# EAGLE board Sensor_7_V4 (EAGLE 7.6.0)
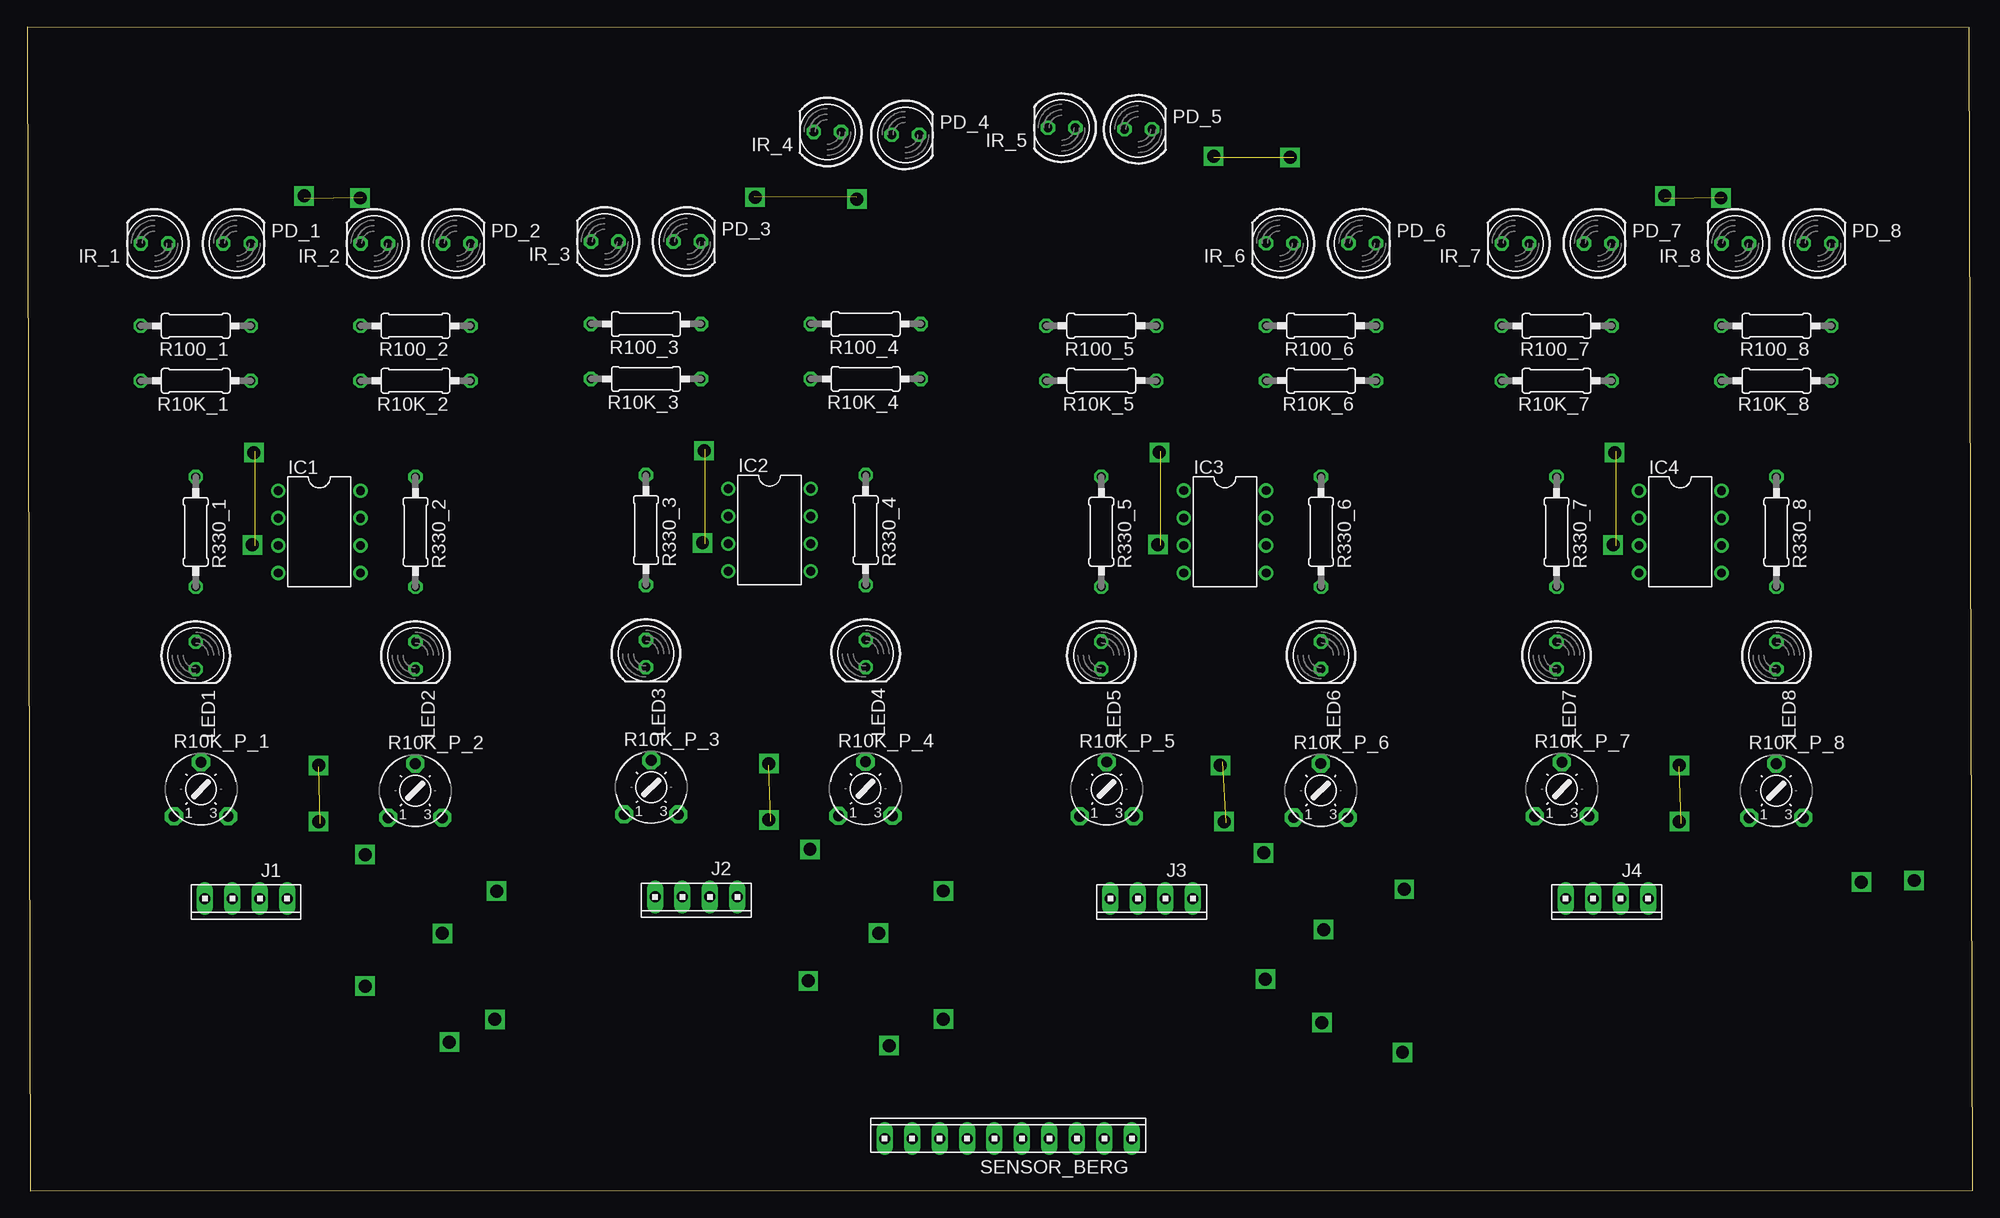
[diagram p0: board, top side]
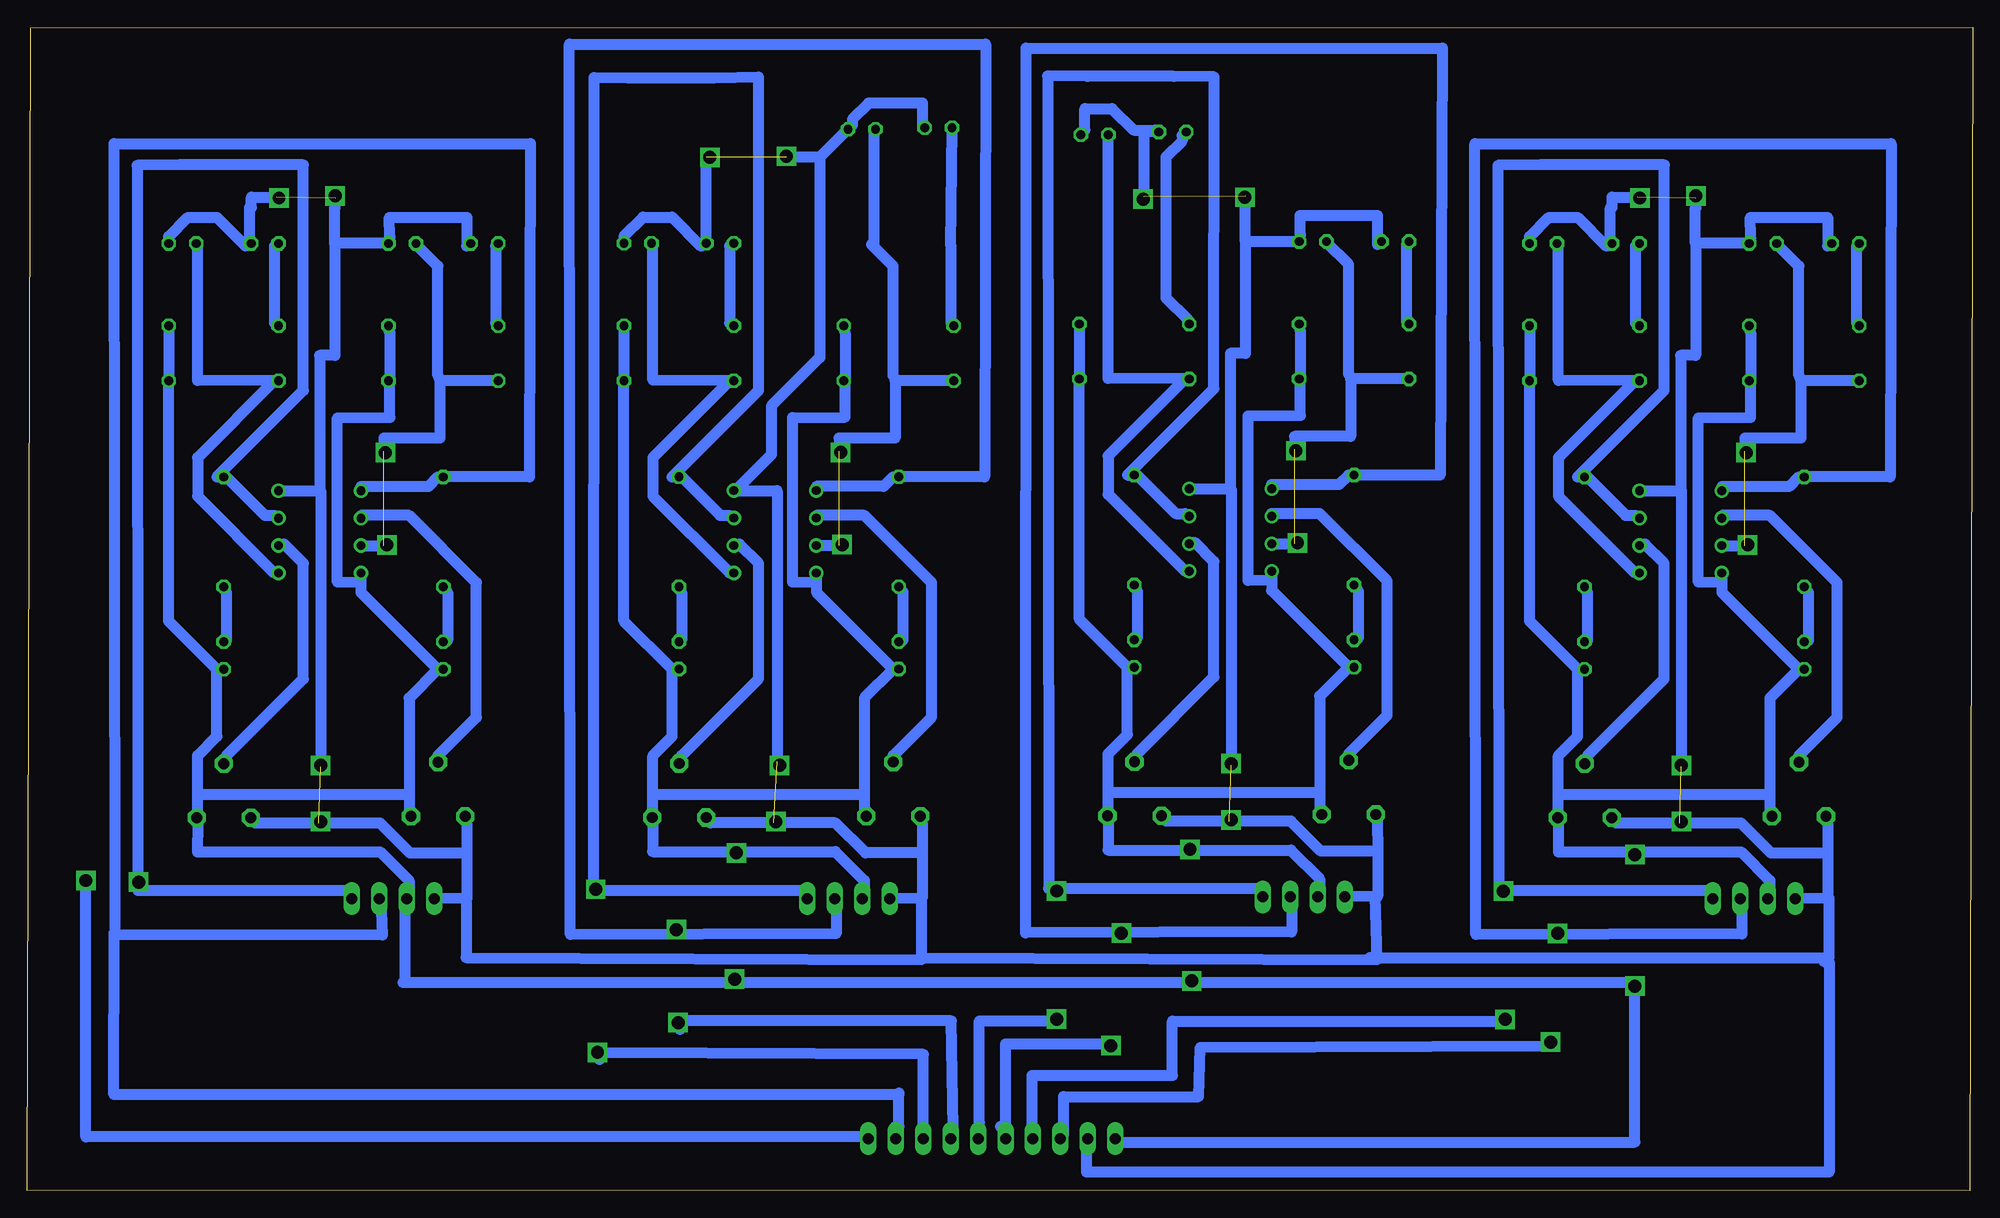
[diagram p1: board, bottom side, seen from below]

Size 179.94 x 107.61 mm. Coordinates in mm from the lower left corner, seen from the top.
Outline: 0.32,0 179.94,0.06 179.61,107.54 0,107.61 0.32,0
Copper layers (1*16): Top 0.035mm / dielectric 1.5mm / Bottom 0.035mm
Design rules "default *": minimum track width 40mil, minimum drill 24mil, track to track 30mil, track to pad 30mil, pad to pad 30mil, via to via 30mil, smd to smd 20mil, copper to edge 40mil, drill to drill 8mil, minimum pad ring 10mil, minimum via ring 8mil, stop-mask expansion 4mil, vias tented up to drill 0mil, thermal gap 10mil

## Footprints (pad centres in the part's own frame; a part is rotated, then mirrored left to right if it is on the bottom)
DIL08 = drill 0.813 pad 1.27: 1 -3.81,-3.81; 2 -1.27,-3.81; 3 1.27,-3.81; 4 3.81,-3.81; 5 3.81,3.81; 6 1.27,3.81; 7 -1.27,3.81; 8 -3.81,3.81
LED5MM = drill 0.813 octagon: A -1.27,0; K 1.27,0
10X04MTA = drill 1.016 long: 1 3.81,0; 2 1.27,0; 3 -1.27,0; 4 -3.81,0
0207/10 = drill 0.813 octagon: 1 -5.08,0; 2 5.08,0
6MM = drill 1 pad 1.676 octagon: A -2.5,-2.5; E 2.5,-2.5; S 0,2.5
10X10MTA = drill 1.016 long: 1 11.43,0; 2 8.89,0; 3 6.35,0; 4 3.81,0; 5 1.27,0; 6 -1.27,0; 7 -3.81,0; 8 -6.35,0; 9 -8.89,0; 10 -11.43,0

## Placement (x,y rotation side)
IC1  LM358N  [DIL08]  27.03,60.93 270 top
IC2  LM358N  [DIL08]  68.66,61.1 270 top
IC3  LM358N  [DIL08]  110.77,60.94 270 top
IC4  LM358N  [DIL08]  152.87,60.93 270 top
IR_1  [LED5MM]  11.79,87.6 180 top
IR_2  [LED5MM]  32.11,87.6 180 top
IR_3  [LED5MM]  53.42,87.77 180 top
IR_4  [LED5MM]  74.01,97.91 180 top
IR_5  [LED5MM]  95.67,98.3 180 top
IR_6  [LED5MM]  115.85,87.61 180 top
IR_7  [LED5MM]  137.63,87.6 180 top
IR_8  [LED5MM]  157.95,87.6 180 top
J1  [10X04MTA]  20.25,27.01 180 top
J2  [10X04MTA]  61.88,27.18 180 top
J3  [10X04MTA]  103.99,27.02 180 top
J4  [10X04MTA]  146.09,27.01 180 top
LED1  [LED5MM]  15.6,49.5 270 top
LED2  [LED5MM]  35.92,49.5 270 top
LED3  [LED5MM]  57.23,49.67 270 top
LED4  [LED5MM]  77.55,49.67 270 top
LED5  [LED5MM]  99.34,49.51 270 top
LED6  [LED5MM]  119.66,49.51 270 top
LED7  [LED5MM]  141.44,49.5 270 top
LED8  [LED5MM]  161.76,49.5 270 top
PD_1  [LED5MM]  19.41,87.6 0 top
PD_2  [LED5MM]  39.73,87.6 0 top
PD_3  [LED5MM]  61.04,87.77 0 top
PD_4  [LED5MM]  81.22,97.64 0 top
PD_5  [LED5MM]  102.75,98.16 0 top
PD_6  [LED5MM]  123.47,87.61 0 top
PD_7  [LED5MM]  145.25,87.6 0 top
PD_8  [LED5MM]  165.57,87.6 0 top
R10K_1  [0207/10]  15.6,74.9 180 top
R10K_2  [0207/10]  35.92,74.9 180 top
R10K_3  [0207/10]  57.23,75.07 180 top
R10K_4  [0207/10]  77.55,75.07 180 top
R10K_5  [0207/10]  99.34,74.91 180 top
R10K_6  [0207/10]  119.66,74.91 180 top
R10K_7  [0207/10]  141.44,74.9 180 top
R10K_8  [0207/10]  161.76,74.9 180 top
R10K_P_1  [6MM]  16.09,37.13 0 top
R10K_P_2  [6MM]  35.9,37 0 top
R10K_P_3  [6MM]  57.72,37.3 0 top
R10K_P_4  [6MM]  77.53,37.17 0 top
R10K_P_5  [6MM]  99.83,37.14 0 top
R10K_P_6  [6MM]  119.64,37.01 0 top
R10K_P_7  [6MM]  141.93,37.13 0 top
R10K_P_8  [6MM]  161.74,37 0 top
R100_1  [0207/10]  15.6,79.98 180 top
R100_2  [0207/10]  35.92,79.98 180 top
R100_3  [0207/10]  57.23,80.15 180 top
R100_4  [0207/10]  77.55,80.15 180 top
R100_5  [0207/10]  99.34,79.99 180 top
R100_6  [0207/10]  119.66,79.99 180 top
R100_7  [0207/10]  141.44,79.98 180 top
R100_8  [0207/10]  161.76,79.98 180 top
R330_1  [0207/10]  15.6,60.93 270 top
R330_2  [0207/10]  35.92,60.93 270 top
R330_3  [0207/10]  57.23,61.1 270 top
R330_4  [0207/10]  77.55,61.1 270 top
R330_5  [0207/10]  99.34,60.94 270 top
R330_6  [0207/10]  119.66,60.94 270 top
R330_7  [0207/10]  141.44,60.93 270 top
R330_8  [0207/10]  161.76,60.93 270 top
SENSOR_BERG  [10X10MTA]  90.73,4.82 0 top

## Library data of the parts
IC1-IC4 = linear
IR_1-IR_8 LED1-LED8 PD_1-PD_8 = led
J1-J4 SENSOR_BERG = con-amp
R10K_1-R10K_8 R100_1-R100_8 R330_1-R330_8 = eagle-ltspice; SPICEMODEL: NONE; SPICEPREFIX: R
R10K_P_1-R10K_P_8 = adafruit

## Nets
GND1: IC1.4 J1.2 LED1.K LED2.K R10K_1.1 R10K_2.1 R10K_P_1.E R10K_P_2.E R100_1.1 R100_2.1
GND2: IC2.4 J2.2 LED3.K LED4.K R10K_3.1 R10K_4.1 R10K_P_3.E R10K_P_4.E R100_3.1 R100_4.1
GND3: IC3.4 J3.2 LED5.K LED6.K R10K_5.1 R10K_6.1 R10K_P_5.E R10K_P_6.E R100_5.1 R100_6.1
GND4: IC4.4 J4.2 LED7.K LED8.K R10K_7.1 R10K_8.1 R10K_P_7.E R10K_P_8.E R100_7.1 R100_8.1
IC4_1: IC1.3 PD_1.A R10K_1.2
IC4_2: IC1.5 PD_2.A R10K_2.2
IC4_3: IC4.3 PD_7.A R10K_7.2
IC4_4: IC2.3 PD_3.A R10K_3.2
IC4_5: IC4.5 PD_8.A R10K_8.2
IC4_6: IC2.5 PD_4.A R10K_4.2
IC4_7: IC3.3 PD_5.A R10K_5.2
IC4_8: IC3.5 PD_6.A R10K_6.2
N$1: LED1.A R330_1.2
N$2: LED2.A R330_2.2
N$3: IC1.6 R10K_P_2.S
N$4: IR_1.K R100_1.2
N$5: IR_2.K R100_2.2
N$6: IC1.2 R10K_P_1.S
N$12: LED3.A R330_3.2
N$13: LED4.A R330_4.2
N$14: IC2.6 R10K_P_4.S
N$15: IR_3.K R100_3.2
N$16: IR_4.K R100_4.2
N$17: IC2.2 R10K_P_3.S
N$18: LED7.A R330_7.2
N$19: LED8.A R330_8.2
N$20: IC4.6 R10K_P_8.S
N$21: IR_7.K R100_7.2
N$22: IR_8.K R100_8.2
N$24: IC4.2 R10K_P_7.S
N$34: LED5.A R330_5.2
N$35: LED6.A R330_6.2
N$36: IC3.6 R10K_P_6.S
N$37: IR_5.K R100_5.2
N$38: IR_6.K R100_6.2
N$39: IC3.2 R10K_P_5.S
SENSOR_1: IC1.1 J1.3 R330_1.1
SENSOR_2: IC1.7 J1.4 R330_2.1
SENSOR_3: IC2.1 J2.3 R330_3.1
SENSOR_4: IC2.7 J2.4 R330_4.1
SENSOR_5: IC3.1 J3.3 R330_5.1
SENSOR_6: IC3.7 J3.4 R330_6.1
SENSOR_7: IC4.1 J4.3 R330_7.1
SENSOR_8: IC4.7 J4.4 R330_8.1
VCC1: IC1.8 IR_1.A IR_2.A J1.1 PD_1.K PD_2.K R10K_P_1.A R10K_P_2.A
VCC2: IC2.8 IR_3.A IR_4.A J2.1 PD_3.K PD_4.K R10K_P_3.A R10K_P_4.A
VCC3: IC3.8 IR_5.A IR_6.A J3.1 PD_5.K PD_6.K R10K_P_5.A R10K_P_6.A
VCC4: IC4.8 IR_7.A IR_8.A J4.1 PD_7.K PD_8.K R10K_P_7.A R10K_P_8.A

## Tracks (layer width: path | path; a pad name or v marks a point on that pad's centre or on a via)
GND1
  Bottom 1.016: 20.55,74.9 20.55,79.34 R100_1.1 | 16.11,48.23 23.22,55.34 23.22,56.23 | IC1.4 23.22,56.23 | 18.77,36.67 18.77,45.56 16.11,48.23 | 18.77,36.67 18.77,34.9 R10K_P_1.E | 16.11,48.23 LED1.K | 20.55,74.9 20.55,71.52 25.39,71.48 25.39,56.28 23.22,56.23 | 20.55,74.9 R10K_1.1 | R100_2.1 R10K_2.1 41,52.67 36.55,48.23 | 36.55,48.23 36.55,42.01 38.33,40.23 38.33,36.67 | 38.33,36.67 38.33,34.9 R10K_P_2.E 38.33,34.01 38.35,31.34 21.44,31.34 18.77,28.67 18.77,27.78 J1.2 | 36.55,48.23 LED2.K | 38.33,36.67 18.77,36.67
GND2
  Bottom 1.016: 62.18,75.07 62.18,79.51 R100_3.1 | 57.74,48.4 64.85,55.51 64.85,56.4 | IC2.4 64.85,56.4 | 60.4,36.84 60.4,45.73 57.74,48.4 | 60.4,36.84 60.4,35.06 R10K_P_3.E | 57.74,48.4 LED3.K | 62.18,75.07 62.18,71.69 67.03,71.65 67.03,56.45 64.85,56.4 | 62.18,75.07 R10K_3.1 | R100_4.1 R10K_4.1 82.63,52.84 78.19,48.4 | 78.19,48.4 78.19,42.18 79.96,40.4 79.96,36.84 | 79.96,36.84 79.96,35.06 R10K_P_4.E 79.96,34.18 79.98,31.51 63.07,31.51 60.4,28.84 60.4,27.95 J2.2 | 78.19,48.4 LED4.K | 79.96,36.84 60.4,36.84
GND3
  Bottom 1.016: 104.29,74.91 104.29,79.35 R100_5.1 | 99.85,48.24 106.96,55.35 106.96,56.24 | IC3.4 106.96,56.24 | 102.52,36.68 102.52,45.57 99.85,48.24 | 102.52,36.68 102.52,34.91 R10K_P_5.E | 99.85,48.24 LED5.K | 104.29,74.91 104.29,71.53 109.14,71.49 109.14,56.29 106.96,56.24 | 104.29,74.91 R10K_5.1 | R100_6.1 R10K_6.1 124.74,52.69 120.3,48.24 | 120.3,48.24 120.3,42.02 122.07,40.24 122.07,36.68 | 122.07,36.68 122.07,34.91 R10K_P_6.E 122.07,34.02 122.09,31.35 105.18,31.35 102.52,28.68 102.52,27.79 J3.2 | 120.3,48.24 LED6.K | 122.07,36.68 102.52,36.68
GND4
  Bottom 1.016: 146.39,74.9 146.39,79.34 R100_7.1 | 141.95,48.23 149.06,55.34 149.06,56.23 | IC4.4 149.06,56.23 | 144.62,36.67 144.62,45.56 141.95,48.23 | 144.62,36.67 144.62,34.9 R10K_P_7.E | 141.95,48.23 LED7.K | 146.39,74.9 146.39,71.52 151.24,71.48 151.24,56.28 149.06,56.23 | 146.39,74.9 R10K_7.1 | R100_8.1 R10K_8.1 166.84,52.67 162.4,48.23 | 162.4,48.23 162.4,42.01 164.17,40.23 164.17,36.67 | 164.17,36.67 164.17,34.9 R10K_P_8.E 164.17,34.01 164.19,31.34 147.28,31.34 144.62,28.67 144.62,27.78 J4.2 | 162.4,48.23 LED8.K | 164.17,36.67 144.62,36.67
IC4_1  (1 unrouted)
  Bottom 1.016: IC1.3 21.1,59.66 21.1,59.59 | R10K_1.2 15.92,74.9 | 15.92,74.9 15.92,69.59 21.1,69.59 21.1,68.39 | PD_1.A 18.11,87.5 16.11,85.5 16.11,75.38 15.92,74.9
IC4_2
  Bottom 1.016: 31.22,74.9 38.33,67.79 38.33,64.23 31.22,57.12 IC1.5 | 31.22,74.9 38.33,74.94 38.33,87.35 PD_2.A | 31.22,74.9 R10K_2.2
IC4_3  (1 unrouted)
  Bottom 1.016: IC4.3 146.94,59.66 146.94,59.59 | R10K_7.2 141.76,74.9 | 141.76,74.9 141.76,69.59 146.94,69.59 146.94,68.39 | PD_7.A 143.94,87.5 141.94,85.5 141.94,75.38 141.76,74.9
IC4_4  (1 unrouted)
  Bottom 1.016: IC2.3 62.73,59.83 62.73,59.76 | R10K_3.2 57.55,75.07 | 57.55,75.07 57.55,69.76 62.73,69.76 62.73,68.56 | PD_3.A 59.73,87.67 57.73,85.67 57.73,75.54 57.55,75.07
IC4_5
  Bottom 1.016: 157.06,74.9 164.17,67.79 164.17,64.23 157.06,57.12 IC4.5 | 157.06,74.9 164.17,74.94 164.17,87.35 PD_8.A | 157.06,74.9 R10K_8.2
IC4_6
  Bottom 1.016: 72.85,75.07 79.96,67.96 79.96,64.4 72.85,57.29 IC2.5 | 72.85,75.07 79.96,75.11 79.96,87.52 PD_4.A | 72.85,75.07 R10K_4.2
IC4_7  (1 unrouted)
  Bottom 1.016: IC3.3 104.84,59.67 104.84,59.6 | R10K_5.2 99.66,74.91 | 99.66,74.91 99.66,69.6 104.84,69.6 104.84,68.4 | 101.76,87.43 99.84,85.51 99.84,75.38 99.66,74.91 | 101.76,87.43 101.84,87.51 | PD_5.A 101.62,98.07 101.62,87.57 101.76,87.43
IC4_8
  Bottom 1.016: 114.96,74.91 122.07,67.8 122.07,64.24 114.96,57.13 IC3.5 | 114.96,74.91 122.07,74.95 122.07,87.36 PD_6.A | 114.96,74.91 R10K_6.2
N$1
  Bottom 1.016: LED1.A 15.22,50.9 15.22,55.34 R330_1.2
N$2
  Bottom 1.016: LED2.A 35.67,50.9 35.67,55.34 R330_2.2
N$3
  Bottom 1.016: IC1.6 30.33,59.79 28.55,58.01 28.55,47.34 35.67,40.23 R10K_P_2.S
N$4
  Bottom 1.016: R100_1.2 10.77,80.23 10.77,87.35 IR_1.K
N$5
  Bottom 1.016: R100_2.2 31.22,80.23 31.22,87.35 IR_2.K
N$6
  Bottom 1.016: IC1.2 23.22,62.45 18.77,62.45 12.55,56.23 12.55,43.79 16.11,40.23 R10K_P_1.S
N$7  (via drill 1.2)
  other vias: 20.97,68.26
N$8  (via drill 1.2)
  other vias: 20.83,59.73
N$9  (via drill 1.2)
  other vias: 26.96,34.13
N$10  (via drill 1.2)
  other vias: 25.62,91.99
N$11  (via drill 1.2)
  other vias: 30.8,91.8
N$12
  Bottom 1.016: LED3.A 56.85,51.07 56.85,55.51 R330_3.2
N$13
  Bottom 1.016: LED4.A 77.3,51.07 77.3,55.51 R330_4.2
N$14
  Bottom 1.016: IC2.6 71.96,59.96 70.18,58.18 70.18,47.51 77.3,40.4 R10K_P_4.S
N$15
  Bottom 1.016: R100_3.2 52.4,80.4 52.4,87.52 IR_3.K
N$16
  Bottom 1.016: R100_4.2 72.62,80.57 74.62,82.57 74.62,95.57 73.12,97.07 73.12,97.57 IR_4.K
N$17
  Bottom 1.016: IC2.2 64.85,62.62 60.4,62.62 54.18,56.4 54.18,43.95 57.74,40.4 R10K_P_3.S
N$18
  Bottom 1.016: LED7.A 141.06,50.9 141.06,55.34 R330_7.2
N$19
  Bottom 1.016: LED8.A 161.51,50.9 161.51,55.34 R330_8.2
N$20
  Bottom 1.016: IC4.6 156.17,59.79 154.39,58.01 154.39,47.34 161.51,40.23 R10K_P_8.S
N$21
  Bottom 1.016: R100_7.2 136.61,80.23 136.61,87.35 IR_7.K
N$22
  Bottom 1.016: R100_8.2 157.06,80.23 157.06,87.35 IR_8.K
N$23  (via drill 1.2)
  other vias: 62.6,68.43
N$24
  Bottom 1.016: IC4.2 149.06,62.45 144.62,62.45 138.39,56.23 138.39,43.79 141.95,40.23 R10K_P_7.S
N$25  (via drill 1.2)
  other vias: 151.46,91.99
N$26  (via drill 1.2)
  other vias: 156.64,91.8
N$27  (via drill 1.2)
  other vias: 146.81,68.26
N$28  (via drill 1.2)
  other vias: 146.67,59.73
N$29  (via drill 1.2)
  other vias: 152.8,34.13
N$30  (via drill 1.2)
  other vias: 62.46,59.9
N$31  (via drill 1.2)
  other vias: 68.59,34.3
N$32  (via drill 1.2)
  other vias: 67.33,91.87
N$33  (via drill 1.2)
  other vias: 76.74,91.69
N$34
  Bottom 1.016: LED5.A 98.96,50.91 98.96,55.35 R330_5.2
N$35
  Bottom 1.016: LED6.A 119.41,50.91 119.41,55.35 R330_6.2
N$36
  Bottom 1.016: IC3.6 114.07,59.8 112.29,58.02 112.29,47.35 119.41,40.24 R10K_P_6.S
N$37
  Bottom 1.016: R100_5.2 94.51,80.24 94.51,87.36 IR_5.K
N$38
  Bottom 1.016: R100_6.2 114.96,80.24 114.96,87.36 IR_6.K
N$39
  Bottom 1.016: IC3.2 106.96,62.46 102.52,62.46 96.29,56.24 96.29,43.8 99.85,40.24 R10K_P_5.S
N$40  (via drill 1.2)
  other vias: 104.71,68.27
N$41  (via drill 1.2)
  other vias: 104.57,59.74
N$42  (via drill 1.2)
  other vias: 110.7,34.14
N$43  (via drill 1.2)
  other vias: 109.73,95.66
N$44  (via drill 1.2)
  other vias: 116.79,95.56
S$1
  Bottom 1.016: 102.07,4.99 174.49,4.99 174.49,28.37
S$2  (via drill 1.2)
  other vias: 174.49,28.69
S$3  (via drill 1.2)
  other vias: 169.63,28.53
S$4  (via drill 1.2)
  other vias: 127.35,27.88
S$5
  Bottom 1.016: 99.65,5.96 99.32,5.96 99.32,9.05
S$6
  Bottom 1.016: 99.32,8.89 171.91,8.89 171.88,23.83
S$7
  Bottom 1.016: 99.81,5.48 99.65,5.48
S$8
  Bottom 1.016: 97.22,4.99 97.05,4.99 97.05,12.62 127.02,12.78 127.02,12.14
S$9
  Bottom 1.016: 94.62,5.8 94.3,5.8 94.46,15.71 119.73,15.71 119.57,14.89
S$10  (via drill 1.2)
  other vias: 127.19,12.79
S$11  (via drill 1.2)
  other vias: 119.73,15.54
S$12  (via drill 1.2)
  other vias: 119.9,24.15
S$13
  Bottom 1.016: 139.34,26.74 139.34,21.55 97.22,21.38 97.22,27.06
S$14
  Bottom 1.016: 97.38,21.54 55.1,21.38 55.26,27.23
S$15
  Bottom 1.016: 55.74,21.55 13.3,21.55 13.3,27.07
S$16
  Bottom 1.016: 145.01,26.74 145.01,19.6
S$17
  Bottom 1.016: 91.87,6.29 91.87,15.7 84.9,15.7
S$18
  Bottom 1.016: 145.17,19.28 31.6,19.28 31.6,19.11
S$19  (via drill 1.2)
  other vias: 84.74,15.87
S$20  (via drill 1.2)
  other vias: 84.74,27.72
S$21
  Bottom 1.016: 89.92,5.96 89.44,5.96 89.44,13.59 80.04,13.59 80.04,13.11
S$22  (via drill 1.2)
  other vias: 79.72,13.43
S$23  (via drill 1.2)
  other vias: 78.75,23.82
S$24
  Bottom 1.016: 87,4.98 87,10.66 74.04,10.66 74.04,15.69 43.43,15.69 43.43,15.53
S$25
  Bottom 1.016: 84.08,5.15 84.08,8.71 71.61,8.71 71.45,13.26 39.38,13.43
S$26  (via drill 1.2)
  other vias: 43.26,15.85
S$27  (via drill 1.2)
  other vias: 43.43,27.7
S$28  (via drill 1.2)
  other vias: 39.05,13.75
S$29  (via drill 1.2)
  other vias: 38.4,23.8
S$30  (via drill 1.2)
  other vias: 31.27,18.92
S$31  (via drill 1.2)
  other vias: 31.27,31.08
S$32  (via drill 1.2)
  other vias: 72.4,31.56
S$33  (via drill 1.2)
  other vias: 72.24,19.4
S$34  (via drill 1.2)
  other vias: 114.34,31.24
S$35  (via drill 1.2)
  other vias: 114.51,19.57
S$36
  Bottom 1.016: 13.78,21.19 13.3,21.19 13.3,1.73 81.96,1.73 81.96,4
S$37
  Bottom 1.016: 79.04,4.49 31.27,4.49 31.27,18.59
S$38  (via drill 1.2)
  other vias: 110.35,39.33
SENSOR_1
  Bottom 1.016: IC1.1 23.22,65.12 17,65.12 16.11,66.01 R330_1.1 7.65,66.01 7.56,96.82 46.05,96.82 45.96,23.68 21.38,23.76 21.38,27.01 J1.3
SENSOR_2
  Bottom 1.016: IC1.7 31.22,62.45 32.11,62.45 35.67,66.01 R330_2.1 36.55,66.01 28.55,74.01 28.54,94.85 31.99,94.89 39.96,94.89 43.93,94.81 43.85,27.78 24.11,27.78 J1.4
SENSOR_3
  Bottom 1.016: IC2.1 64.85,65.29 58.63,65.29 57.74,66.18 R330_3.1 49.28,66.18 49.06,105.65 87.55,105.65 87.59,23.85 63.01,23.93 63.01,27.18 J2.3
SENSOR_4
  Bottom 1.016: IC2.7 72.85,62.62 73.74,62.62 77.3,66.18 R330_4.1 78.19,66.18 70.18,74.18 70.17,103 73.89,103.04 81.86,103.04 85.56,103.1 85.48,27.95 65.74,27.95 J2.4
SENSOR_5
  Bottom 1.016: IC3.1 106.96,65.13 100.74,65.13 99.85,66.02 R330_5.1 91.39,66.02 91.3,106.02 129.79,106.02 129.7,23.69 105.12,23.77 105.12,27.02 J3.3
SENSOR_6
  Bottom 1.016: IC3.7 114.96,62.46 115.85,62.46 119.41,66.02 R330_6.1 120.3,66.02 112.29,74.02 112.28,102.99 116.41,102.88 124.38,102.88 127.53,102.94 127.59,27.79 107.85,27.79 J3.4
SENSOR_7
  Bottom 1.016: IC4.1 149.06,65.12 142.84,65.12 141.95,66.01 R330_7.1 133.49,66.01 133.4,96.82 171.89,96.82 171.8,23.68 147.08,23.63 147.22,27.01 J4.3
SENSOR_8
  Bottom 1.016: IC4.7 157.06,62.45 157.95,62.45 161.51,66.01 R330_8.1 162.4,66.01 154.39,74.01 154.38,94.85 157.83,94.89 165.8,94.89 169.77,94.81 169.69,27.78 149.95,27.78 J4.4
VCC1  (via drill 1.2)  (2 unrouted)
  Bottom 1.016: 13.43,31.23 13.43,27.04 J1.1 | 13.43,31.23 13.44,34.01 R10K_P_1.A | 27.13,34.01 33,34.01 R10K_P_2.A | 13.43,31.23 18.66,31.23 21.44,34.01 27.13,34.01 | PD_2.K 41,88.24 39.22,90.01 36.55,90.01 33.89,87.35 IR_2.A 33.52,87.6 33.52,90.9 33.36,90.9 33.36,91.89 31.18,91.89 | IR_1.A 13.44,87.35 13.44,90.01 20.59,90.01 20.55,88.24 PD_1.K 25.64,87.6 | IC1.8 27.04,64.74 | 27.04,64.74 26.96,64.74 v26.96,39.33 26.96,39.2 | 27.13,34.01 27.13,33.84 | 25.64,87.6 25.64,77.26 27.04,77.26 27.04,64.74 | 25.64,87.6 25.66,87.6 25.66,90.88 25.62,90.88 25.62,91.8 | 30.99,91.89 31.18,91.89 | 31.18,91.89 31.18,91.8
VCC2  (via drill 1.2)  (2 unrouted)
  Bottom 1.016: 55.06,31.4 55.06,27.21 J2.1 | 55.06,31.4 55.07,34.18 R10K_P_3.A | 68.76,34.18 74.63,34.18 R10K_P_4.A | 55.06,31.4 60.29,31.4 63.07,34.18 68.76,34.18 | IR_3.A 55.07,87.52 55.07,90.18 62.21,90.18 62.18,88.41 PD_3.K 67.27,87.77 | IC2.8 68.67,64.91 | 68.67,64.91 68.59,64.91 v68.59,39.5 68.59,39.37 | 68.76,34.18 68.76,34.01 | 67.27,87.77 67.27,77.43 68.67,77.43 68.67,64.91 | 67.27,87.77 67.29,87.77 67.29,91.05 67.25,91.05 67.25,91.97 | PD_4.K 82.12,98.07 82.12,100.07 79.62,100.07 77.62,98.07 75.62,98.07 IR_4.A 76.67,97.91 76.67,91.93
VCC3  (2 unrouted)
  Bottom 1.016: 97.17,31.24 97.17,27.05 J3.1 | 97.17,31.24 97.18,34.02 R10K_P_5.A | 110.87,34.02 116.74,34.02 R10K_P_6.A | 97.17,31.24 102.41,31.24 105.18,34.02 110.87,34.02 | PD_6.K 124.74,88.25 122.96,90.02 120.3,90.02 117.63,87.36 IR_6.A 117.15,87.61 117.15,95.59 | 110.87,34.02 110.87,33.85 | IR_5.A 97.12,98.57 97.12,100.57 102.12,100.57 103.62,99.07 103.62,98.57 PD_5.K 104.12,98.07 106.62,95.57 | 106.62,95.57 106.62,77.07 111.12,72.57 111.12,68.07 114.12,65.07 IC3.8 110.58,64.75 110.58,39.67 | 106.62,95.57 109.75,95.57 109.75,95.5
VCC4  (via drill 1.2)  (2 unrouted)
  Bottom 1.016: 139.27,31.23 139.27,27.04 J4.1 | 139.27,31.23 139.28,34.01 R10K_P_7.A | 152.97,34.01 158.84,34.01 R10K_P_8.A | 139.27,31.23 144.5,31.23 147.28,34.01 152.97,34.01 | PD_8.K 166.84,88.24 165.06,90.01 162.4,90.01 159.73,87.35 IR_8.A 159.36,87.6 159.36,90.9 159.2,90.9 159.2,91.89 157.02,91.89 | IR_7.A 139.28,87.35 139.28,90.01 146.43,90.01 146.39,88.24 PD_7.K 151.48,87.6 | IC4.8 152.88,64.74 | 152.88,64.74 152.8,64.74 v152.8,39.33 152.8,39.2 | 152.97,34.01 152.97,33.84 | 151.48,87.6 151.48,77.26 152.88,77.26 152.88,64.74 | 151.48,87.6 151.5,87.6 151.5,90.88 151.46,90.88 151.46,91.8 | 156.83,91.89 157.02,91.89 | 157.02,91.89 157.02,91.8